# Altium PCB sustentationAvecPC.PcbDoc
Units mil, origin at the board's own origin, x right, y up, seen from the top; angles counter-clockwise.
Board outline 3950 x 3950 mil, 3 copper layers (Top Layer, Mid-Layer 1, Bottom Layer); 26 components, 21 nets, 95 pads, 0 vias.
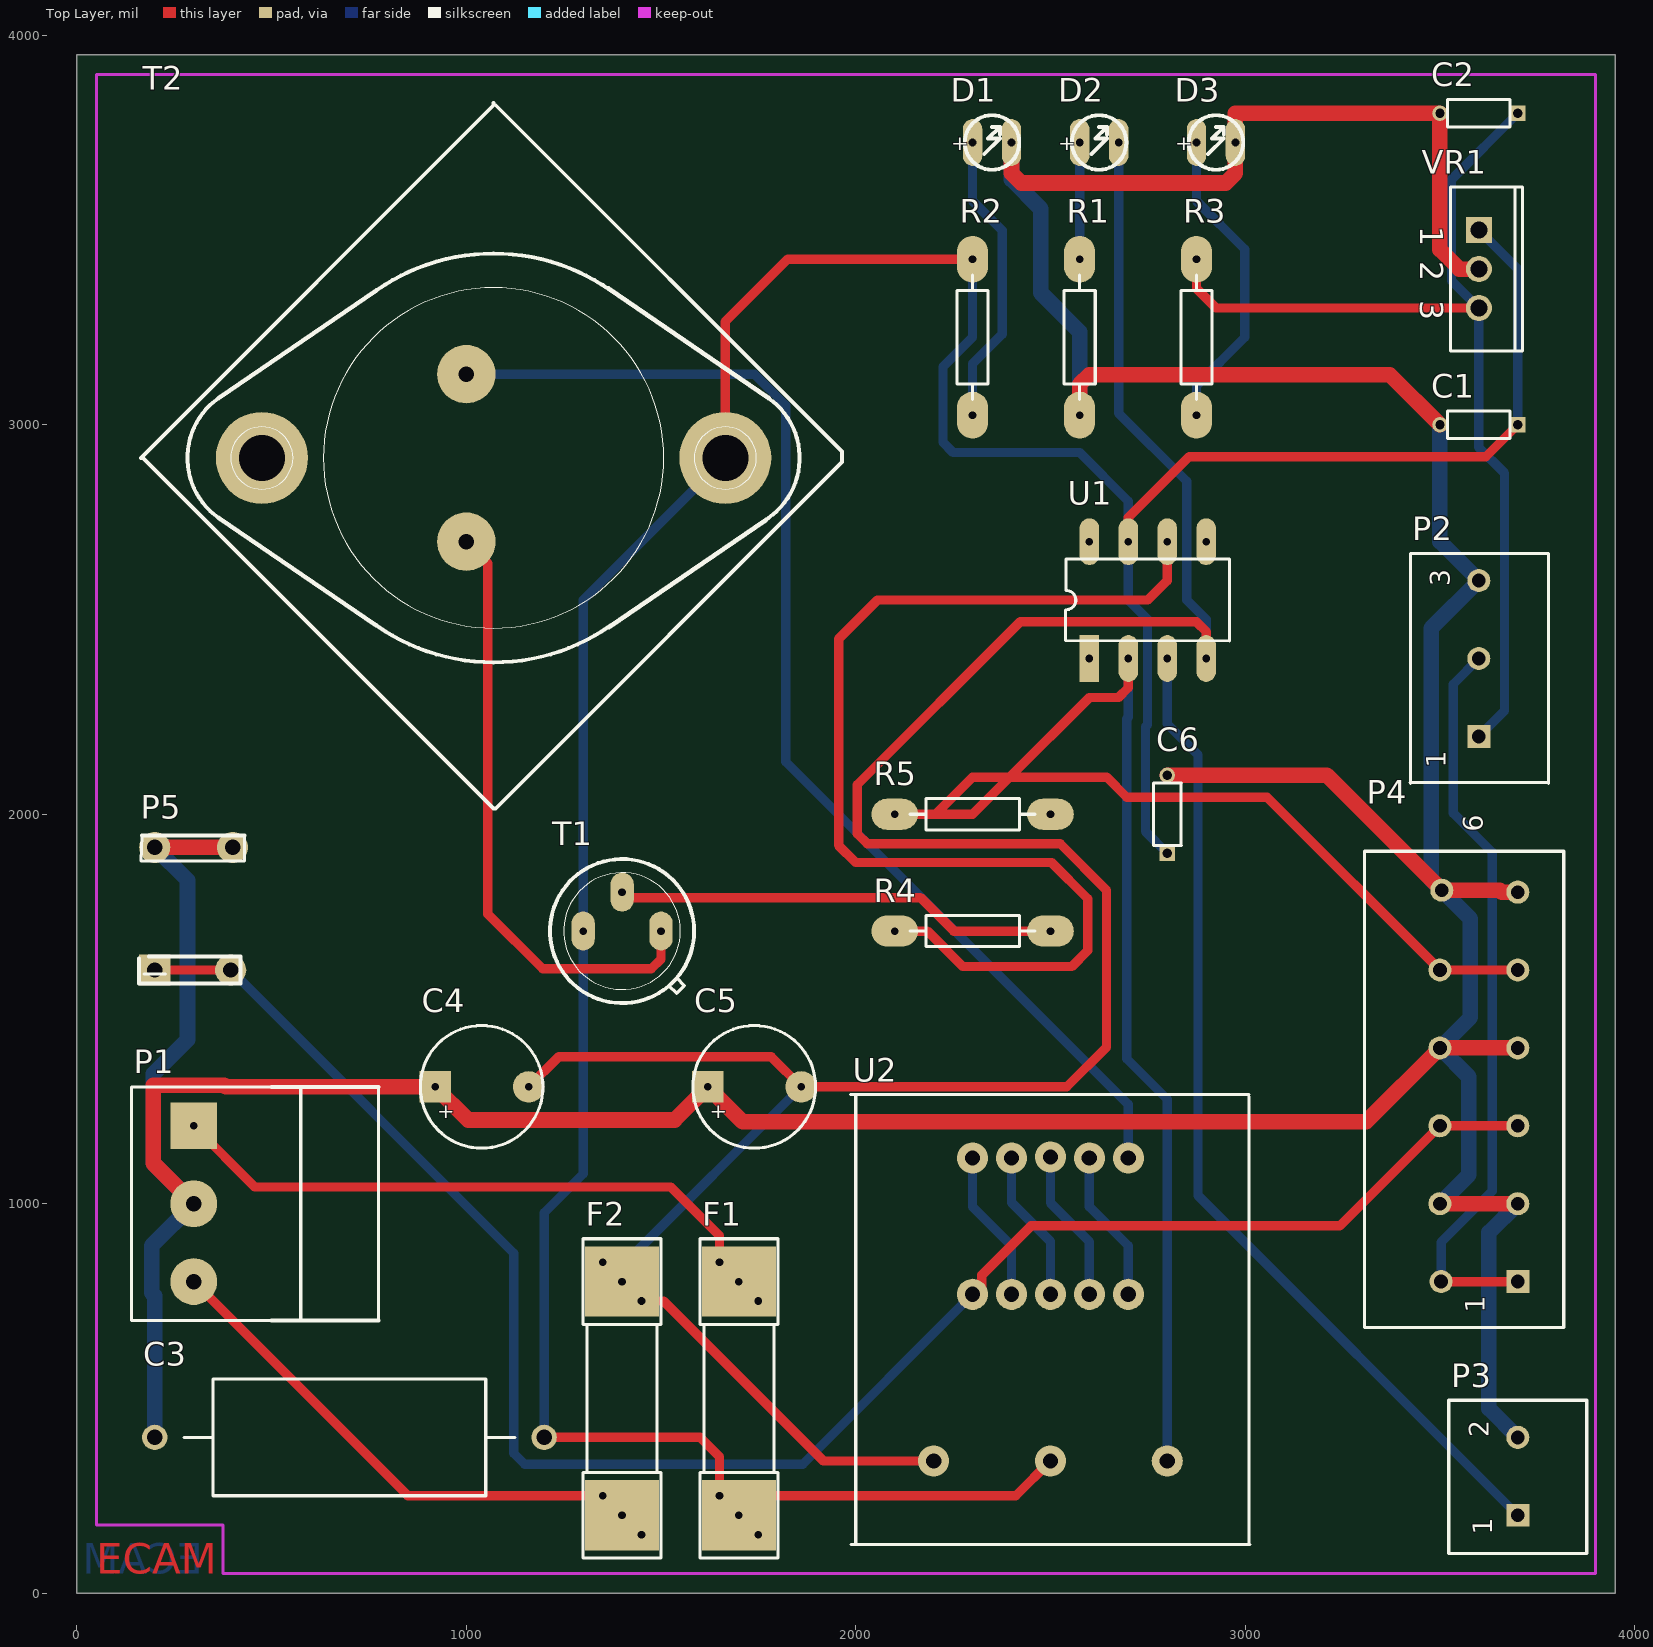
[diagram p0: Top Layer view]
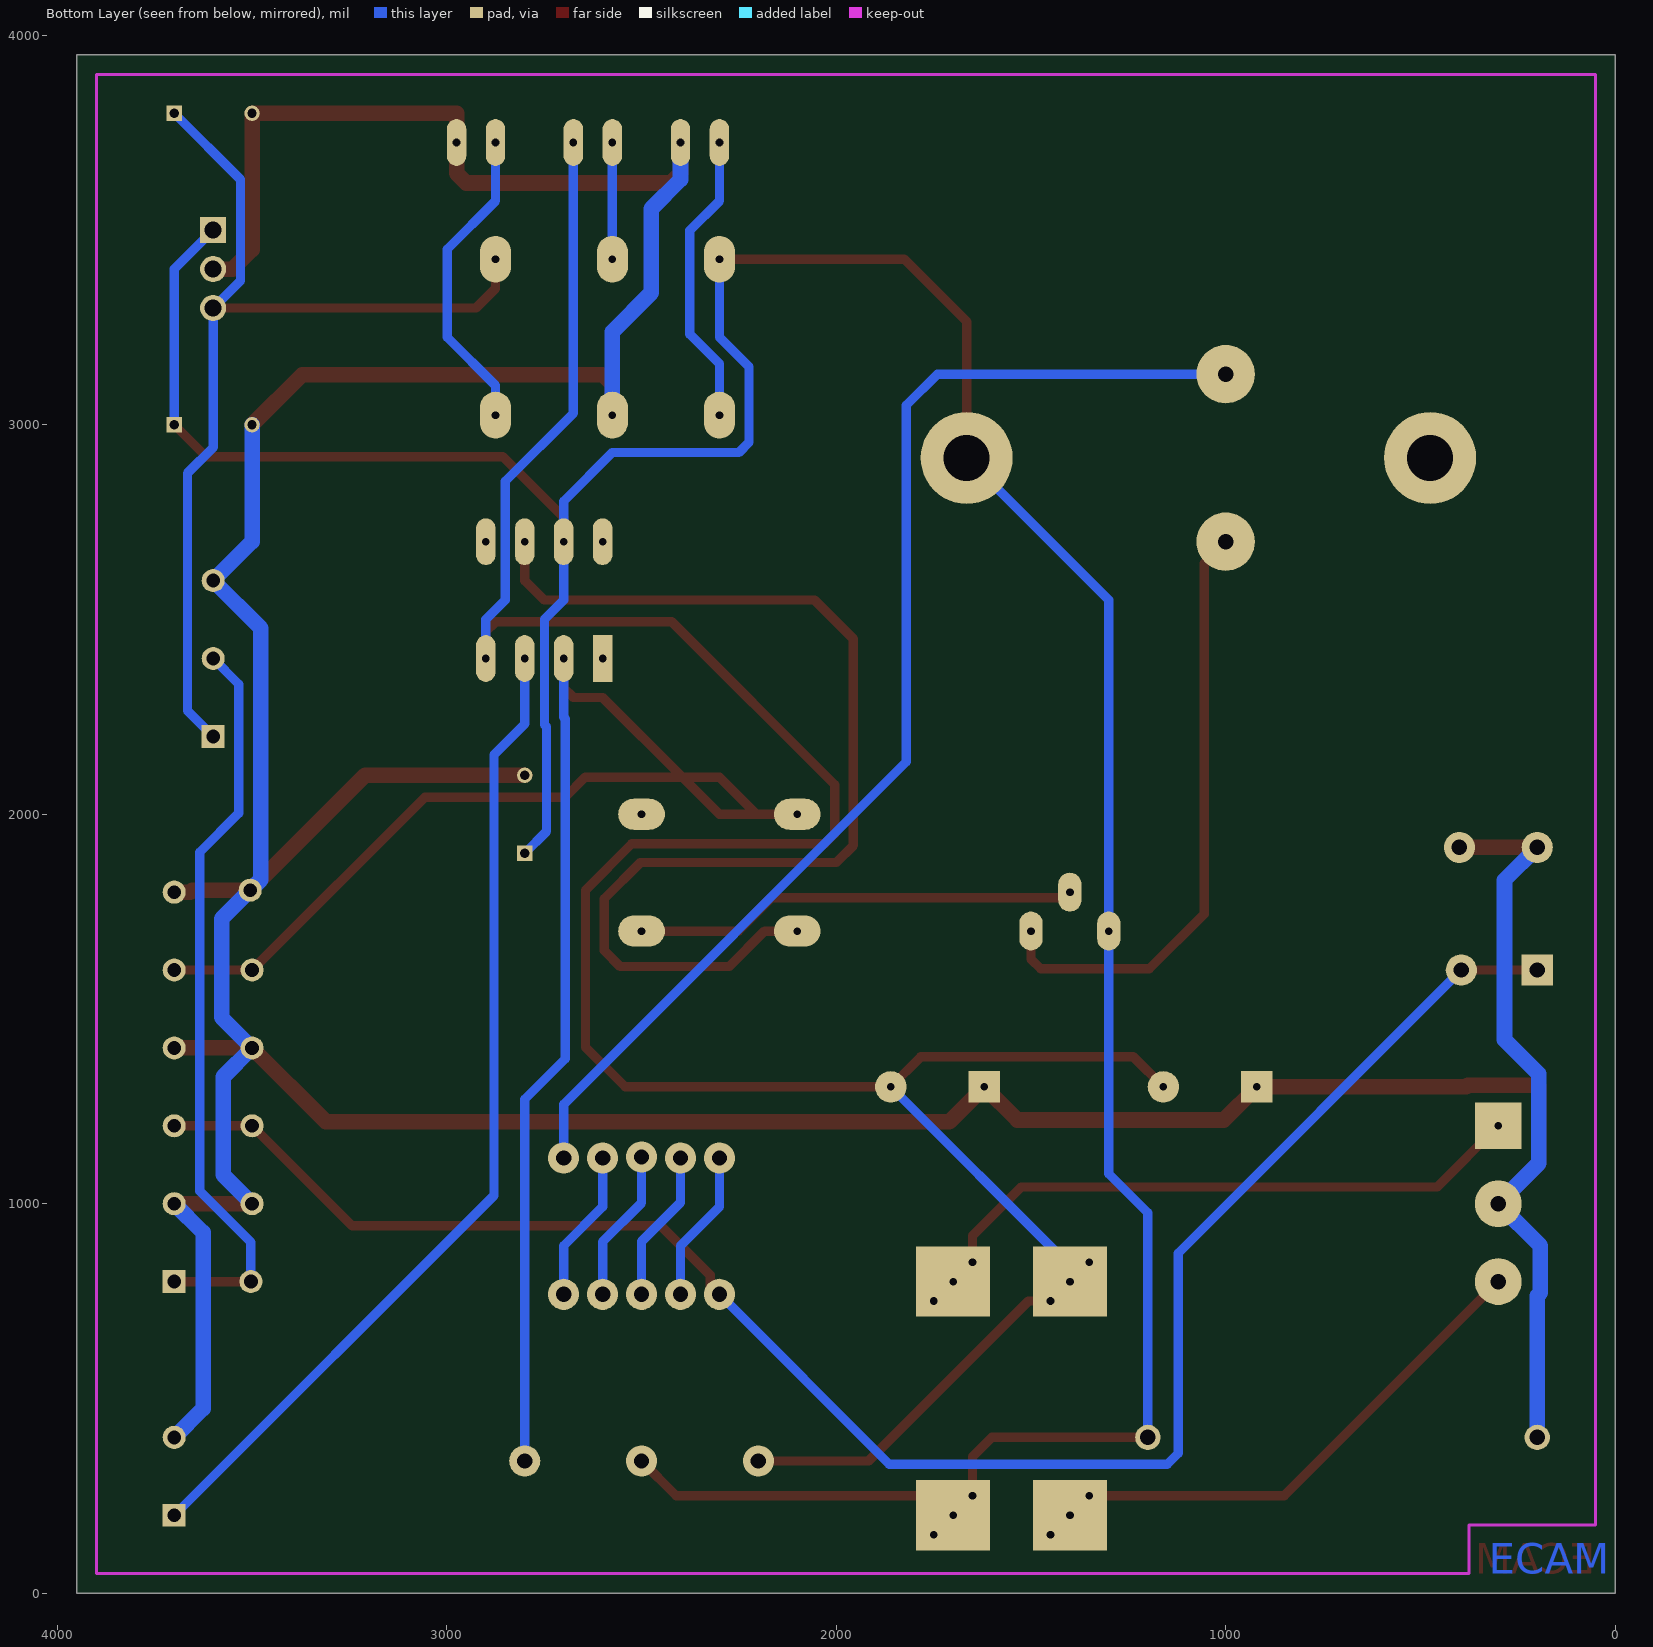
[diagram p1: Bottom Layer view, seen from below]
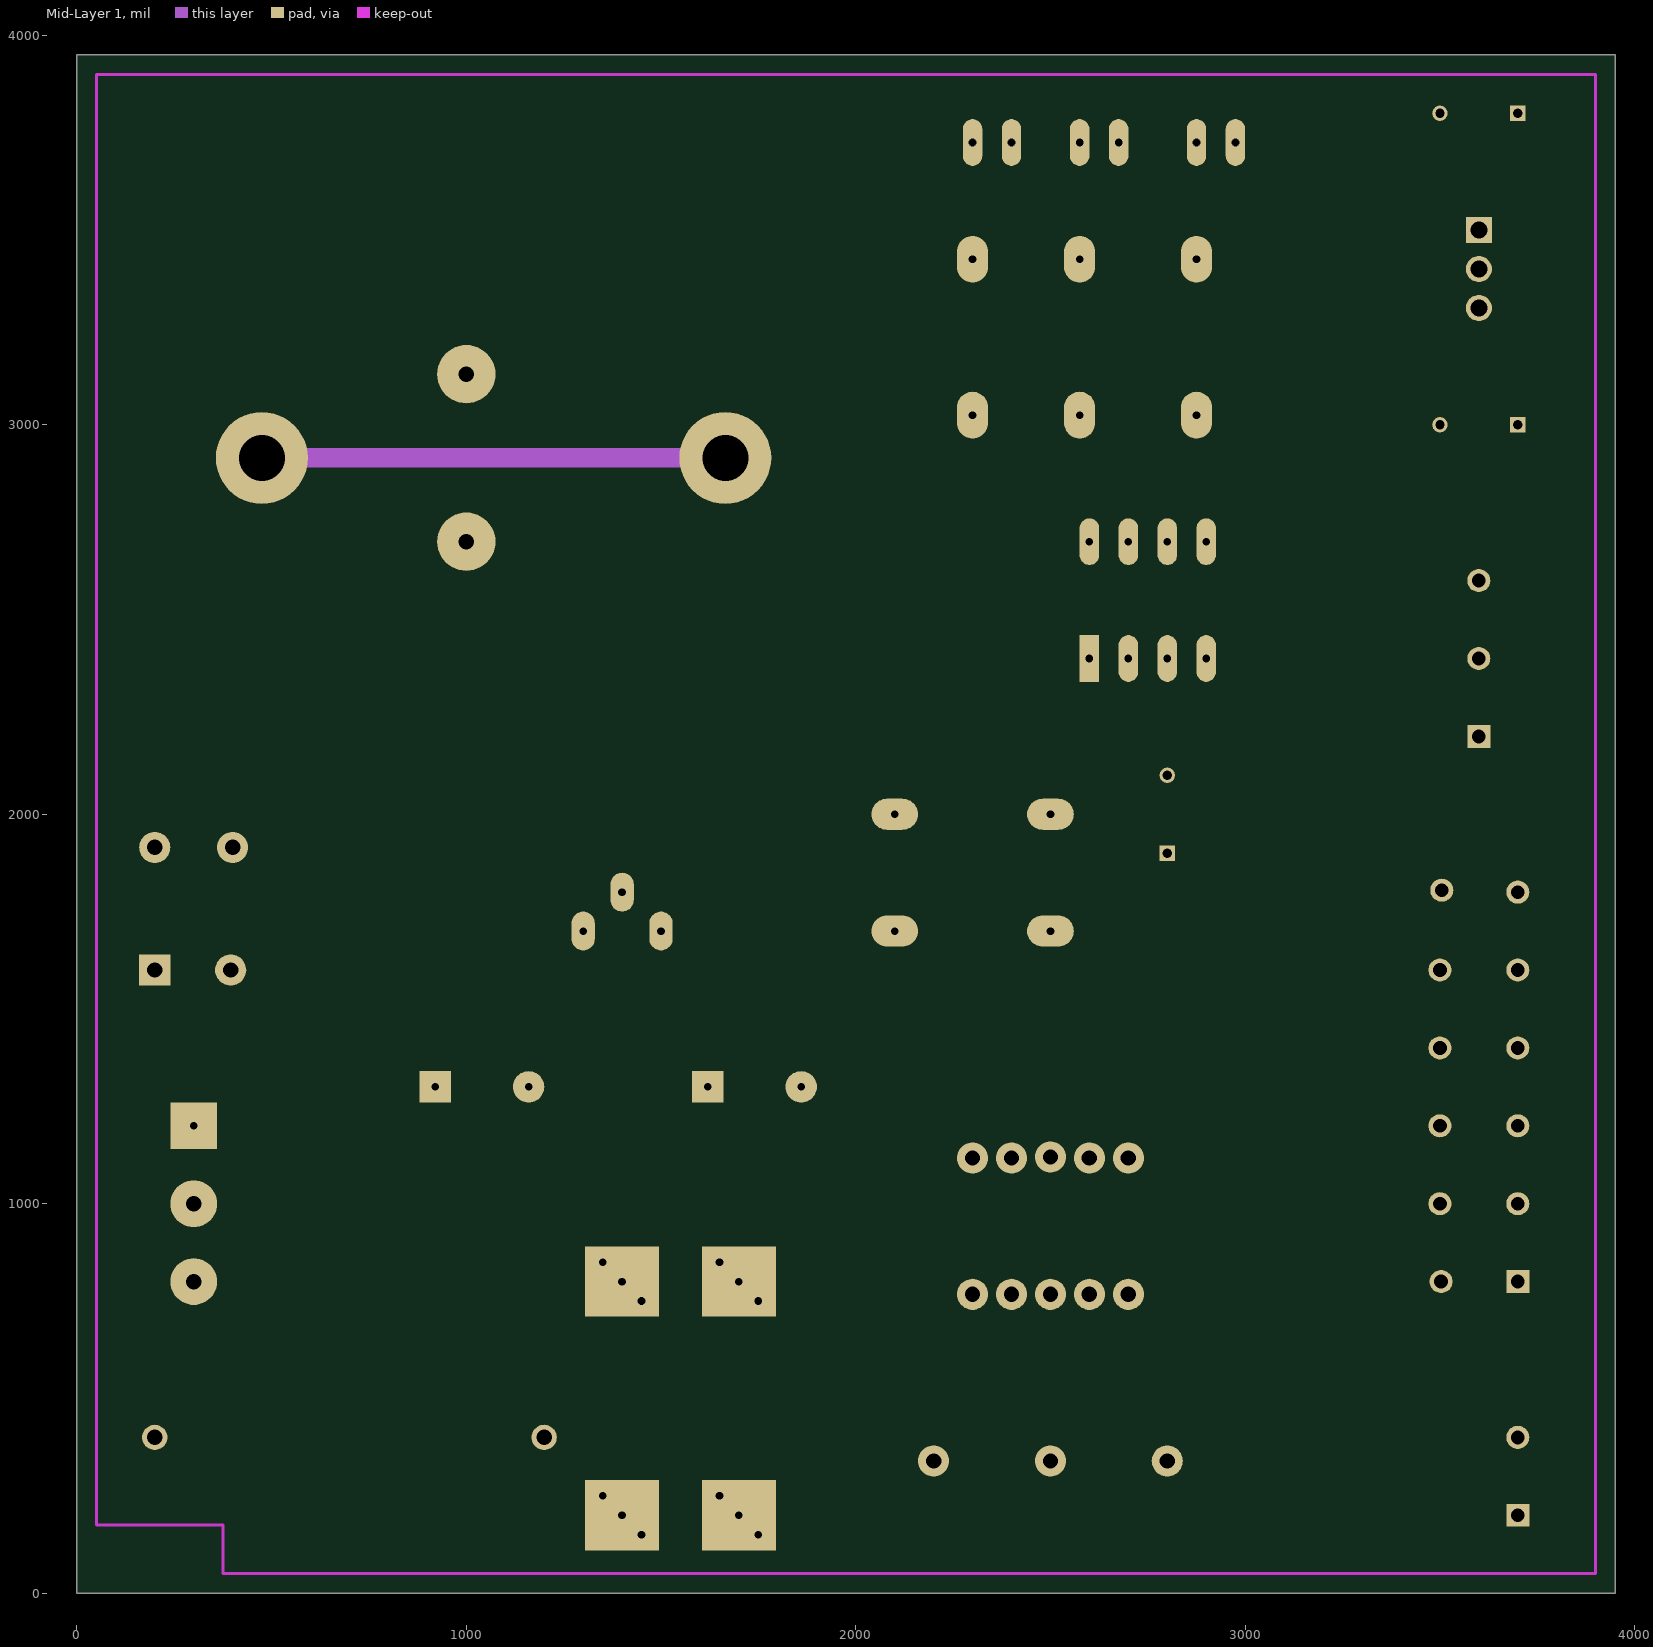
[diagram p2: Mid-Layer 1]

## Layer stack, top to bottom
Top Layer: signal copper 1.4
Dielectric: core 12.6, FR-4, Dk 4.8
Mid-Layer 1: signal copper 1.4
Dielectric: dielectric 12.6, FR-4, Dk 4.8
Bottom Layer: signal copper 1.4

## Board outline
0,0 0,3950 3950,3950 3950,0

## Design rules (kind name [scope] priority, off if disabled: settings)
Clearance "Clearance T DIP" [(IsTrack) vs (IsPad AND(
HasFootprint('DIP*')))] p1: gap=12
Clearance "Clearance PT" [(isTrack) vs (isPad)] p2: gap=24
Clearance "Clearance TT" [(isTrack) vs (isTrack)] p3: gap=24
Clearance [All] p4: gap=40
ComponentClearance [All] p1: gap=10 collisioncheckmode=0 verticalgap=10
HoleSize [All] p1: absolutevalues=TRUE maxlimit=21.65 minlimit=17.72 maxpercent=80.000 minpercent=20.000
PolygonConnect [All] p1: connectstyle=Relief reliefconductorwidth=10 reliefentries=4 polygonreliefangle="90 Angle"
RoutingCorners [All] p1: cornerstyle=45-Degree minsetback=100 maxsetback=1000
RoutingLayers [All] p1: top layer_v5=TRUE mid layer 1_v5=FALSE bottom layer_v5=TRUE
RoutingVias "ECAM Vias" [All] p1: holewidth=19.68 width=80 viastyle="Through Hole" minholewidth=17.72 minwidth=60 maxholewidth=21.65 maxwidth=120
SolderMaskExpansion [All] p1: expansion=4
TestPointUsage [All] p1: valid=0 allowmultiple=FALSE
Testpoint [All] p1: side=15 testpointundercomponent=TRUE minsize=40 maxsize=100 preferedsize=60 minholesize=0 maxholesize=40 preferedholesize=32 testpointgrid=1 style=1023 order=0-112345678
Width Width_GND [InNet('GND')] p1: maxlimit=1000 minlimit=24 preferedwidth=40
Width Width_VCC [InNet('VCC')] p2: maxlimit=1000 minlimit=24 preferedwidth=40
Width [All] p3: maxlimit=1000 minlimit=16 preferedwidth=24
14 further rules are at their usual default settings.

## Components (designator, comment, footprint, x,y, rotation, side; value= is the part's Value field where it differs from the comment)
C1 "Condensateur" Capa_100n 3700,3000 r180 top
C2 "Condensateur" Capa_100n 3700,3800 r180 top
C3 "Cond pol radial" AXIAL-1.0 700,400 r180 top
C4 "Cond pol radial" CAPPR_100u 1000,1300 r0 top
C5 "Cond pol  rad" CAPPR_100u 1700,1300 r0 top
C6 "Condensateur" Capa_100n 2800,1900 r90 top
D1 "LED" "Led 0.1" 2300,3725 r0 top
D2 "LED" "Led 0.1" 2575,3725 r0 top
D3 "LED" "Led 0.1" 2875,3725 r0 top
F1 "" FUSE-10 1700,800 r270 top
F2 "" FUSE-10 1400,200 r90 top
P1 "Alim +/-15V" CONVIS-3 300,1200 r270 top
P2 "Hall sensor" "connecteur capteur Hall" 3600,2200 r90 top
P3 "Connecteur PC Sortie de Commande" "connecteur PC Sorties command" 3700,200 r90 top
P4 "Connecteur PC Entrees" "connecteur PC Entrées" 3700,800 r90 top
P5 "Sortie Electro-aimant" "connecteur 3A" 200,1600 r90 top
R1 "Résistance" AXIAL-0.4 2575,3025 r90 top
R2 "Résistance" AXIAL-0.4 2300,3025 r90 top
R3 "Résistance" AXIAL-0.4 2875,3025 r90 top
R4 "Résistance" AXIAL-0.4 2500,1700 r180 top
R5 "Résistance" AXIAL-0.4 2500,2000 r180 top
T1 "NPN" TO-5 1500,1700 r0 top
T2 "NPN_Puissance" TO-3 1000,2700 r0 top
U1 "Op Amp" DIP8 2600,2400 r0 top
U2 "CapteurDeCourant" Sonde_Courant 2500,700 r0 top
VR1 "7805" "TO-220 regulateur" 3600,3400 r270 top

## Footprints (in the part's own frame and the unit in brackets; to place one, negate y for a bottom-side part, rotate by r counter-clockwise, add the part's x,y. Pads: shape width x height; smd on the part's side, far side on the other; paste and mask are expansions set on the pad)
AXIAL-0.4 [mil]
  oval 120x80 hole 19.68: 1(0,0) 2(400,0)
  silkscreen extent 40,-40 360,40
AXIAL-1.0 [mm] "Adjustable Magnetic-Core Inductor; 2 Leads"
  round 1.65 hole 1: 1(-12.7,0) 2(12.7,0)
  silkscreen extent -10.79,-3.81 10.79,3.81
Capa_100n [mm] "Connector; Header; 2 Position"
  rect 1x1 hole 0.6: 1(0,0)
  round 1 hole 0.6: 2(5.08,0)
  silkscreen extent 0.5,-0.91 4.57,0.89
CAPPR_100u [mil]
  rect 80.63x80.63 hole 19.68: 1(-80,0)
  round 80.63 hole 19.68: 2(160,0)
  silkscreen extent -118,-157 197,157
"connecteur 3A" [mil] "Connector; Header; 2 Position"
  rect 80x80 hole 39.37: 1(0,0)
  round 80 hole 39.37: 1(0,-195) 2(314.96,-200) 2(314.96,0)
  silkscreen extent -35,-230 346,40
"connecteur capteur Hall" [mm] "Connector; Header; 3x1 Position"
  rect 1.5x1.5 hole 0.9: 1(0,0)
  round 1.5 hole 0.9: 2(5.08,0) 3(10.16,0)
  silkscreen extent -3.06,-4.55 11.94,4.5
"connecteur PC Entrées" [mm] "Connector; Header; 6x2 Position"
  round 1.5 hole 0.9: 1(0,5) 2(5.08,0) 2(5.08,5.08) 3(10.16,0) 3(10.16,5.08) 4(15.24,0) 4(15.24,5.08) 5(20.32,0) 5(20.32,5.08) 6(25.4,0) 6(25.527,4.953)
  rect 1.5x1.5 hole 0.9: 1(0,0)
  silkscreen extent -3,-3 28.07,10
"connecteur PC Sorties command" [mm] "Connector; Header; 2x1 Position"
  rect 1.5x1.5 hole 0.9: 1(0,0)
  round 1.5 hole 0.9: 2(5.08,0)
  silkscreen extent -2.5,-4.5 7.5,4.5
CONVIS-3 [mil]
  rect 120x120 hole 19.68: 1(0,0)
  round 120 hole 39.37: 2(200,0) 3(400,0)
  silkscreen extent -100,-160 500,475
DIP8 [mil]
  rect 50x120 hole 19.68: 1(0,0)
  oval 50x120 hole 19.68: 2(100,0) 3(200,0) 4(300,0) 5(300,300) 6(200,300) 7(100,300) 8(0,300)
  silkscreen extent -62,45 360,255
FUSE-10 [mil]
  rect 80x90 hole 19.68: 1(-50,-50) 1(50,50) 2(550,-50) 2(650,50)
  rect 180x190 hole 19.68: 1(0,0) 2(600,0)
  Mid-Layer 1 lines w50: 550,-50 600,0 650,50 ; -50,-50 0,0 50,50
  silkscreen extent -110,-100 710,100
"Led 0.1" [mil]
  oval 50x120 hole 19.68: 1(0,0) 2(100,0)
  silkscreen extent -20,-70 120,70
Sonde_Courant [mil] "Adjustable Magnetic-Core Inductor; 2 Leads"
  round 80 hole 39.37: 1(200,417.32) 2(100,417.32) 3(0,420) 4(-100,417.32) 5(-200,417.32) 6(-200,67.32) 7(-100,67.32) 8(0,67.32) 9(100,67.32) 10(200,67.32) 11(-300,-360.63) 12(0,-360.63) 13(300,-360.63)
  silkscreen extent -514,-575 512,580
TO-3 [mm]
  round 3.81 hole 1: 1(0,0) 2(0,10.922)
  round 6 hole 3: 3(-13.335,5.461) 3(16.891,5.461)
  Mid-Layer 1 lines w1.27: -13.335,5.461 16.891,5.461
  silkscreen extent -21.22,-17.4 24.51,28.6
TO-5 [mil]
  oval 60x100 hole 19.68: 1(0,0) 2(-100,100) 3(-200,0)
  silkscreen extent -285,-185 85,185
"TO-220 regulateur" [mm] "TO, Thru-Hole, Vertical, Heatsink Mounted; 3 In-Line Leads; Pitch 2.54 mm"
  rect 1.7x1.7 hole 1.1: 1(-2.54,0)
  round 1.7 hole 1.1: 2(0,0) 3(2.54,0)
  silkscreen extent -5.35,-1.85 5.35,2.85

## Part data
C3 C4: "Condensateur polatisé"
C5: library part "Cond pol radial", "Condensateur polatisé"
F1 F2: library part Fusible, "Fusible"
P1 P2: library part "connecteur 3", "Header, 3-Pin"
P3 P5: library part "Connecteur 2", "Connecteur"
P4: library part "Header 6", "Header, 6-Pin"
R1 R2 R3 R4 R5: "Résistance standard"
T1 T2: "NPN Bipolar Transistor"
U1: "FET Operational Amplifier"
VR1: library part "Volt Reg", "Voltage Regulator"

## Nets (pads, with @x,y where several pads share a name; then routed paths per layer and width w, separated by ;. In a path a pad name is that pad's centre, name@x,y a point inside that pad or via, vN(x,y) a via of type N, cw(c..) or ccw(c..) an arc to the next point about the centre after c; other vN are vias at no path point)
GND: C1.2 C2.2 C3.2 C4.1 C5.1 C6.2 D1.2 D3.2 P1.2 P2.3 P3.2 P4.2 P4.4 P4.6 P5.2 R1.1 VR1.2 | length 13693.7
  Top Layer w40: P5.2@200,1914.96 P5.2@400,1914.96 ; P1.2 196,1104 196,1304 379,1304 383,1300 C4.1 1005,1215 1535,1215 C5.1 1709.5,1210.5 3310.5,1210.5 3500,1400 P4.4@3700,1400 ; D1.2 2400,3646 2425,3621 2950,3621 2975,3646 D3.2 2975,3800 C2.2 3500,3450 3550,3400 VR1.2 ; R1.1 2575,3104 2600,3129 3371,3129 C1.2 ; C6.2 3210,2100 3505,1805 3654,1805 3659,1800 P4.6@3700,1800 ; P4.2@3500,1000 P4.2@3700,1000
  Bottom Layer w40: C3.2 200,763 192,771 192,892 P1.2 196,1104 196,1333 284,1421 284,1830.96 P5.2@200,1914.96 ; D1.2 2400,3630 2475,3555 2475,3339 2575,3239 R1.1 ; P4.2@3500,1000 3574,1074 3574,1326 3500,1400 3578.47,1478.47 3578.47,1731.53 3505,1805 3478,1832 3478,2478 P2.3 3500,2700 C1.2 ; P3.2 3626,474 3626,926 P4.2@3700,1000
NetC1_1: C1.1 C3.1 C6.1 F1.2 R2.2 T1.3 T2.3 U1.7 U2.12 VR1.1 | length 8908.2
  Top Layer w24: C3.1 1600,400 1650,350 1650,250 1700,250 2410.63,250 U2.12 ; T2.3@1665,2915 1665,3265 1825,3425 R2.2 ; U1.7 2700,2762 2856,2918 3618,2918 C1.1
  Bottom Layer w24: C3.1 1200,977 1300,1077 T1.3 1300,2550 T2.3@1665,2915 ; R2.2 2300,3225 2224,3149 2224,2955 2250,2929 2575,2929 2700,2804 U1.7 2700,2550 2749,2501 2749,2230 2744,2225 2744,1956 C6.1 ; VR1.1 3700,3400 C1.1
NetC2_1: C2.1 P2.1 R3.2 VR1.3 | length 2574.8
  Top Layer w24: R3.2 2875,3350 2925,3300 VR1.3
  Bottom Layer w24: P2.1 3666,2266 3666,2876 3600,2942 VR1.3 3530,3370 3530,3630 C2.1
NetC4_2: C4.2 C5.2 D2.2 F2.2 U1.4 U2.11 | length 7002.3
  Top Layer w24: C4.2 1237,1377 1783,1377 C5.2 2542,1300 2644,1402 2644,1805 2525,1924 2030,1924 2004,1950 2004,2076 2422,2494 2875,2494 2900,2469 U1.4 ; F2.2@1450,750 1506.37,750 1917,339.37 U2.11
  Bottom Layer w24: F2.2@1350,850 1400,850 1410,850 C5.2 ; D2.2 2675,3030 2850,2855 2850,2550 2900,2500 U1.4
NetD1_1: D1.1 R2.1 | length 763
  Bottom Layer w24: R2.1 2300,3157 2376,3233 2376,3499 2300,3575 D1.1
NetD2_1: D2.1 R1.2 | length 300
  Bottom Layer w24: R1.2 D2.1
NetD3_1: D3.1 R3.1 | length 802.7
  Bottom Layer w24: R3.1 2875,3101 2999,3225 2999,3451 2875,3575 D3.1
NetF1_1: F1.1 P1.1 | length 1534.8
  Top Layer w24: P1.1 457,1043 1525,1043 1650,918 F1.1@1650,850
NetF2_1: F2.1 P1.3 | length 1277.8
  Top Layer w24: P1.3 850,250 F2.1@1350,250
NetP2_2: P2.2 P4.1 | length 1920.2
  Top Layer w24: P4.1@3503.15,800 P4.1@3700,800
  Bottom Layer w24: P4.1@3503.15,800 3503.15,901.15 3634.47,1032.47 3634.47,1902.53 3534,2003 3534,2334 P2.2
NetP3_1: P3.1 U1.3 | length 2572.8
  Bottom Layer w24: U1.3 2800,2232 2879,2153 2879,1021 P3.1
NetP4_3: P4.3 P5.1 U2.6 | length 4715.8
  Top Layer w24: P5.1@200,1600 P5.1@395,1600 ; U2.6 2324,767.32 2324,817 2450,943 3243,943 3500,1200 P4.3@3700,1200
  Bottom Layer w24: P5.1@395,1600 1122,873 1122,359 1150,331 1863.68,331 U2.6
NetP4_5: P4.5 R5.2 U1.2 U2.13 | length 4654.4
  Top Layer w24: R5.2 2205,2000 ; U1.2 2700,2325 2675,2300 2600,2300 2395,2095 ; P4.5@3700,1600 3500,1600 3056,2044 2696,2044 2645,2095 2395,2095 ; 2205,2000 2300,2095 2395,2095 ; 2205,2000 2300,2000 2395,2095
  Bottom Layer w24: U1.2 2700,2249 2696,2245 2696,1372 2800,1268 U2.13
NetR4_1: R4.1 T1.2 | length 1149.6
  Top Layer w24: T1.2 1400,1786 2166,1786 2252,1700 R4.1
NetR4_2: R4.2 U1.6 | length 2916.6
  Top Layer w24: R4.2 2184,1700 2275,1609 2555,1609 2596,1650 2596,1783 2503,1876 2000,1876 1956,1920 1956,2450 2056,2550 2750,2550 2800,2600 U1.6
NetT1_1: T1.1 T2.1 | length 1564.5
  Top Layer w24: T2.1 1055,2645 1055,1744 1196,1603 1475,1603 1500,1628 T1.1
NetT2_2: T2.2 U2.1 | length 3150.3
  Bottom Layer w24: T2.2 1740,3130 1820,3050 1820,2135 2700,1255 U2.1
NetU2_2: U2.2 U2.10 | length 391.4
  Bottom Layer w24: U2.2 2600,992 2700,892 U2.10
NetU2_3: U2.3 U2.9 | length 394.1
  Bottom Layer w24: U2.3 2500,1002 2600,902 U2.9
NetU2_4: U2.4 U2.8 | length 391.4
  Bottom Layer w24: U2.4 2400,1003 2500,903 U2.8
NetU2_5: U2.5 U2.7 | length 391.4
  Bottom Layer w24: U2.5 2300,992 2400,892 U2.7
pads on no net: R5.1 U1.1 U1.5 U1.8

## Keep-outs
Keep-Out Layer:
  lines w8: 50,175 375,175 375,50 3900,50 3900,3900 50,3900 50,175

## Other copper
Top Layer:
  text "ECAM" at 50,50 h78.74
  text ".GTL" at 6664,-1553 h90
Bottom Layer:
  text "ECAM" at 325,50 h78.74
  text ".GBL" at 6664,-1553 h90
Multi-Layer:

## Silkscreen, mask and mechanical layers (free items; w line width, h text height)
Top Overlay:
  text ".GTO" at 6664,-1553 h90
Top Paste:
  text ".GTP" at 6664,-1553 h90
Bottom Paste:
  text ".GBP" at 6664,-1553 h90
Top Solder:
  text ".GTS" at 6664,-1553 h90
Bottom Solder:
  text ".GBS" at 6664,-1553 h90
Mechanical 1:
  the board outline again, w7.87
Mechanical 16:
  circle w3.94: c5570,-1540 r55.12
  lines w5: -3275,-250 -3075,-250 ; -3275,1650 -3075,1650 ; -3275,3550 -3075,3550 ; -795,-2150 -795,-1950 ; -795,5250 -795,5450 ; 2080,-2150 2080,-1950 ; 2080,5250 2080,5450 ; 2715,-1650 7215,-1650 ; 2715,-1350 7215,-1350 ; 2715,-1050 4215,-1050 ; 3365,815 3565,815 ; 4215,-1950 4215,-1350 4215,-750 ; 4955,-2150 4955,-1950 ; 4955,5250 4955,5450 ; 6315,-1950 6315,-1350 ; 7215,-260 7415,-260 ; 7215,3540 7415,3540 ; 2715,-1950 1315,-1950 1315,-750 2715,-750 ; 2715,-1950 7215,-1950 ; 2715,-1950 2715,-750 ; 2715,-750 4215,-750 ; 4215,-750 7215,-750 7215,-1950 ; 7215,-1950 7215,5250 -3075,5250 -3075,-1950 7215,-1950 ; -3275,-2150 -3275,5450 7415,5450 7415,-2150 -3275,-2150
  text "1" at -2243,5315 h70
  text "2" at 617,5315 h70
  text "3" at 3497,5315 h70
  text "4" at 6367,5315 h70
  text "A" at -3200,4409 h70
  text "A" at 7290,4399 h70
  text "B" at -3200,2517 h70
  text "B" at 3440,1682 h70
  text "C" at -3200,607 h70
  text "C" at 7290,597 h70
  text "Concepteur du circuit :" at 2765,-850 h45
  text "TITRE :" at 4265,-850 h45
  text "ERM" at 3140,-1000 h80
  text "Sustentation pilote par PC" at 4525,-1120 h100
  text "Concepteur du PCB :" at 2765,-1145 h45
  text "ERM" at 1550,-1160 h240
  text "D" at -3200,-1283 h70
  text "D" at 7290,-1293 h70
  text "ERM" at 3135,-1305 h80
  text "Av. Renaissance 30" at 1620,-1430 h60
  text "Date :" at 2765,-1450 h45
  text "PART NO.:" at 4265,-1450 h45
  text "Layer :" at 6365,-1450 h45
  text ".Print_Date" at 3155,-1485 h70
  text "1" at 4270,-1570 h60
  text "C" at 5545,-1570 h60
  text ".Print_Time" at 3160,-1615 h70
  text "1000 Bruxelles" at 1620,-1650 h60
  text "Nom du fichier :" at 2765,-1750 h45
  text "DWG NO:" at 4265,-1750 h45
  text ".Print_Scale" at 6525,-1830 h40
  text ".Printout_Name" at 4415,-1865 h60
  text ".Pcb_File_Name_No_Path" at 2815,-1870 h70
  text "1" at -2243,-2085 h70
  text "2" at 617,-2085 h70
  text "3" at 3497,-2085 h70
  text "4" at 6367,-2085 h70

## Text inside footprints (layer, text, board x,y; h text height)
C4: Top Overlay "+" at 925,1220 h39.37
C5: Top Overlay "+" at 1625,1220 h39.37
D1: Top Overlay "+" at 2245,3705 h39.37
D2: Top Overlay "+" at 2520,3705 h39.37
D3: Top Overlay "+" at 2820,3705 h39.37
P2: Top Overlay "1" at 3515,2120 h50 r90; Top Overlay "3" at 3525,2585 h50 r90
P3: Top Overlay "2" at 3625,400 h50 r90; Top Overlay "1" at 3635,150 h50 r90
P4: Top Overlay "6" at 3610,1955 h50 r90; Top Overlay "1" at 3615,720 h50 r90
VR1: Top Overlay "3" at 3449.41,3319.69 h59.06 r270; Top Overlay "2" at 3449.41,3419.69 h59.06 r270; Top Overlay "1" at 3449.41,3509.84 h59.06 r270